# Altium PCB LEDBoard.PcbDoc
Units mm, origin at the board's own origin, x right, y up, seen from the top; angles counter-clockwise.
Board outline 21 x 160 mm, 2 copper layers (Top Layer, Bottom Layer), stack 0.51 mm thick; 16 components, 17 nets, 70 pads, 14 vias.
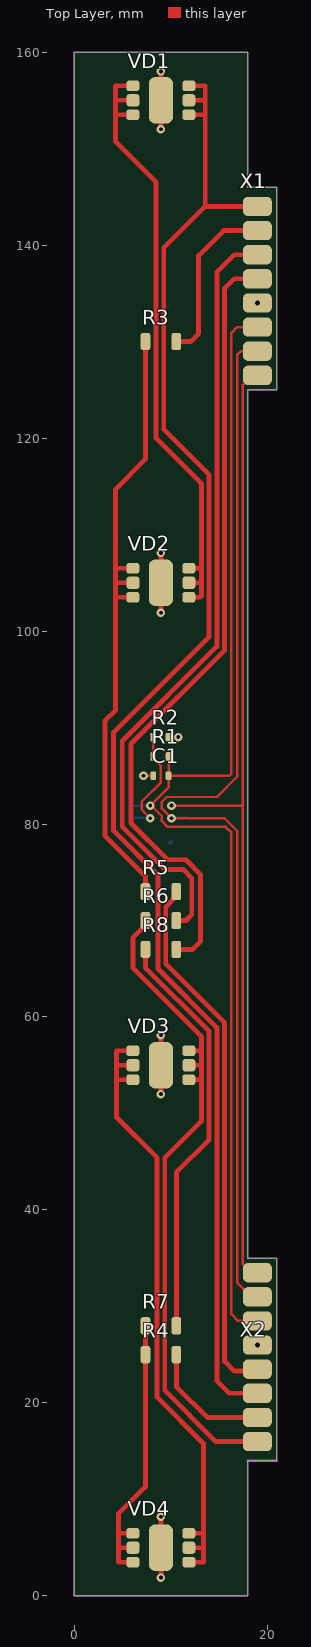
[diagram p0: Top Layer view]
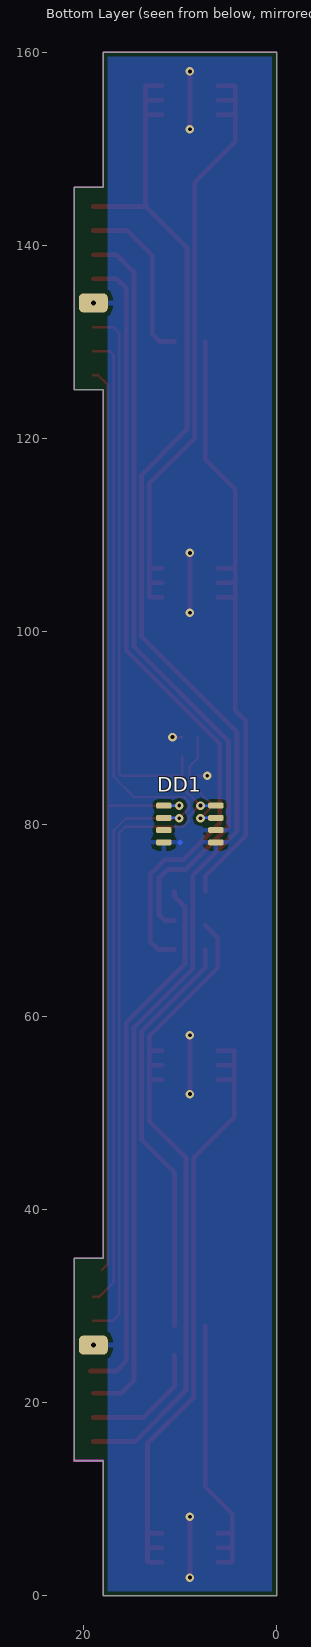
[diagram p1: Bottom Layer view, seen from below]

## Layer stack, top to bottom
Top Solder: solder mask 0.0102, Solder Resist, Dk 3.5
Top Layer: signal copper 0.035
Dielectric 1: dielectric 0.44, FR-4, Dk 4.8
Bottom Layer: signal copper 0.035
Bottom Solder: solder mask 0.0102, Solder Resist, Dk 3.5

## Board outline
0,0 0,160 18,160 18,146 21,146 21,125 18,125 18,35 21,35 21,14 18,14 18,0

## Design rules (kind name [scope] priority, off if disabled: settings)
Clearance Clearance_Mid2_to_edge [OnLayer('Mid-Layer 2') vs OnLayer('Keep-Out Layer')] p1: gap=0.5
Clearance Clearance_Mid1_to_edge [OnLayer('Mid-Layer 1') vs OnLayer('Keep-Out Layer')] p2: gap=0.5
Clearance Clearance_Top_to_edge [OnLayer('Top Layer') vs OnLayer('Keep-Out Layer')] p3: gap=0.25
Clearance Clearance_Bottom_to_edge [OnLayer('Bottom Layer') vs OnLayer('Keep-Out Layer')] p4: gap=0.25
Clearance ClearancePoly [InPolygon] p5: gap=0.3
Clearance [All] p6: gap=0.25
FabricationTestPointUsage TestPointUsage [All] p1: valid=0 allowmultiple=FALSE
FabricationTestpoint Testpoint [All] p1: side=3 testpointundercomponent=TRUE minsize=1.016 maxsize=2.54 preferedsize=1.524 minholesize=0 maxholesize=1.016 preferedholesize=0.813 testpointgrid=0.025 allowsidetop=TRUE allowsidebottom=TRUE usegrid=TRUE gridtolerance=0
PolygonConnect PolygonConnectToPad [All vs (InPadClass('All Pads'))] p1: connectstyle=Relief reliefconductorwidth=0.5 reliefentries=4 polygonreliefangle="90 Angle" airgapwidth=0.5
PolygonConnect [All] p2: connectstyle=Direct reliefconductorwidth=0.25 reliefentries=4 polygonreliefangle="45 Angle" airgapwidth=0.4
RoutingVias [All] p1: holewidth=0.4 width=0.9 viastyle="Through Hole" minholewidth=0.4 minwidth=0.9 maxholewidth=1 maxwidth=2
SilkToSolderMaskClearance SilkscreenOverComponentPads [IsPad] p1: minsilkscreentomaskgap=0.254 clearancetoexposedcopper=TRUE
SolderMaskExpansion [All] p1: expansion=0.102
Width [All] p1: maxlimit=3 minlimit=0.25 preferedwidth=0.5 minimp=50.000000 maximp=50.000000 favimp=50.000000
26 further rules are at their usual default settings.

## Components (designator, comment, footprint, x,y, rotation, side; value= is the part's Value field where it differs from the comment)
C1 "0.1u/16V/X7R" CapacitorSMD0603(manual) 9,85 r0 top
DD1 "LM75A" SO8 9,80 r180 bottom
R1 "47k/5%" ResistorSMD0603(manual) 9,87 r180 top
R2 "47k/5%" ResistorSMD0603(manual) 9,89 r0 top
R3 "0" ResistorSMD1206(manual) 9,130 r0 top
R4 "0" ResistorSMD1206(manual) 9,25 r0 top
R5 "0" ResistorSMD1206(manual) 9,73 r0 top
R6 "0" ResistorSMD1206(manual) 9,70 r0 top
R7 "0" ResistorSMD1206(manual) 9,28 r0 top
R8 "0" ResistorSMD1206(manual) 9,67 r0 top
VD1 "OLP-5065F6L-06A" OLP-5065F6L-06A(manualVar1) 9,155 r0 top
VD2 "OLP-5065F6L-06A" OLP-5065F6L-06A(manualVar1) 9,105 r0 top
VD3 "OLP-5065F6L-06A" OLP-5065F6L-06A(manualVar1) 9,55 r0 top
VD4 "OLP-5065F6L-06A" OLP-5065F6L-06A(manualVar1) 9,5 r0 top
X1 "ConnectorLEDSide" CONNECTORLEDSIDE 19,144 r0 top
X2 "ConnectorLEDSide" CONNECTORLEDSIDE 19,16 r180 top

## Footprints (in the part's own frame and the unit in brackets; to place one, negate y for a bottom-side part, rotate by r counter-clockwise, add the part's x,y. Pads: shape width x height; smd on the part's side, far side on the other; paste and mask are expansions set on the pad)
CapacitorSMD0603(manual) [mm]
  rrect50% 0.6x0.9 smd: 1(-0.8,0) 2(0.8,0)
  body extent -0.8,-0.4 0.8,0.4, height 0.45
CONNECTORLEDSIDE [mm]
  rrect50% 3x2 smd: 1(0,0) 2(0,-2.5) 3(0,-5) 4(0,-7.5) 6(0,-12.5) 7(0,-15) 8(0,-17.5)
  rrect50% 3x2 hole 0.5: 5(0,-10)
OLP-5065F6L-06A(manualVar1) [mm]
  rrect50% 1.35x1.1 smd: 1(-2.9,-1.5) 1(-2.9,1.5) 2(2.9,-1.5) 2(2.9,1.5)
  rrect50% 1.35x1.3 smd: 1(-2.9,0) 2(2.9,0)
  rrect50% 2.5x4.8 smd: 3(0,0)
  body extent -3.2,-2.5 3.2,2.5, height 1.3
ResistorSMD0603(manual) [mm]
  rrect50% 0.6x0.9 smd: 1(-0.8,0) 2(0.8,0)
  body extent -0.8,-0.4 0.8,0.4, height 0.45
ResistorSMD1206(manual) [mm]
  rrect50% 1x1.8 smd: 1(-1.6,0) 2(1.6,0)
  body extent -1.6,-0.8 1.6,0.8, height 0.6
SO8 [mm]
  rrect50% 1.6x0.6 smd: 1(-2.7,1.905) 2(-2.7,0.635) 3(-2.7,-0.635) 4(-2.7,-1.905) 5(2.7,-1.905) 6(2.7,-0.635) 7(2.7,0.635) 8(2.7,1.905)
  body extent -2,-2.5 2,2.5, height 1.8

## Part data
C1: library part CapacitorSMD0603(reflow), "CAPACITOR Capacitor SMD 0603 1.6x0.8mm"
DD1: "IC Temperature sensor"
R1 R2: library part ResistorSMD0603(reflow), "RESISTOR Resistor SMD 0603 1.6x0.8mm"
R3 R4 R5 R6 R7 R8: library part ResistorSMD1206, "RESISTOR Resistor SMD 1210 3.1x1.6mm"
VD1 VD2 VD3 VD4: "White LED 1.0W 155lm 3.0V 350mA"

## Via types
v1: diameter 0.9, hole 0.4, Top Layer to Bottom Layer, 14 vias

## Nets (pads, with @x,y where several pads share a name; then routed paths per layer and width w, separated by ;. In a path a pad name is that pad's centre, name@x,y a point inside that pad or via, vN(x,y) a via of type N, cw(c..) or ccw(c..) an arc to the next point about the centre after c; other vN are vias at no path point)
A0: DD1.7 R1.2 R2.1 | length 11.4
  Top Layer w0.254: v1(7.9,80.6) 7,81.5 7,82.3 9,84.3 9,86 R1.2@8.2,86.8 ; R1.2 R2.1
  Bottom Layer w0.254: DD1.7 7.965,80.635 v1@8,80.6
GND: C1.1 DD1.4 DD1.5 DD1.6 R2.2 VD1.3 VD2.3 VD3.3 VD4.3 X1.5 X2.5 | length 26.6
  Top Layer w0.25: v1(7.2,85) C1.1 ; R2.2 v1(10.8,89)
  Top Layer w0.5: v1(9,1.9) VD4.3 v1(9,8.2) ; v1(9,52) VD3.3 v1(9,58.1) ; v1(9,101.9) VD2.3 v1(9,108.1) ; v1(9,152) VD1.3 v1(9,158)
  Bottom Layer w0.5: 10,78.1 10.005,78.095
NetR3_2: R3.2 X1.2 | length 17.9
  Top Layer w0.5: R3.2 12.1,130 12.9,130.8 12.9,138.9 15.5,141.5 X1.2
NetR4_2: R4.2 X2.2 | length 13
  Top Layer w0.5: R4.2 10.6,21.7 13.8,18.5 X2.2
NetR5_2: R5.2 X2.4 | length 55.8
  Top Layer w0.5: R5.2 10.6,72.5 9.5,71.4 9.5,65.5 15.6,59.4 15.6,24.3 16.6,23.3 X2.4@19.3,23.3
NetR6_2: R6.2 X1.3 | length 81.5
  Top Layer w0.5: R6.2 11.6,70 12.2,70.6 12.2,74.4 11.3,75.3 9.4,75.3 5,79.7 5,88.6 14.8,98.4 14.8,137.2 16.6,139 X1.3
NetR7_2: R7.2 R8.1 | length 43.1
  Top Layer w0.5: R8.1 7.4,65.1 14,58.5 14,47.3 10.6,43.9 R7.2
NetR8_2: R8.2 X1.4 | length 82.5
  Top Layer w0.5: R8.2 12.3,67 13.1,67.8 13.1,74.8 11.6,76.3 9.7,76.3 5.9,80.1 5.9,88.3 15.6,98 15.6,135.5 16.6,136.5 X1.4
SCL: DD1.2 X1.7 X2.7 | length 115.5
  Top Layer w0.254: X2.7 18.4,31 16.9,32.5 16.9,79.3 15.6,80.6 v1(10.1,80.6) 9.1,81.6 9.1,82.3 9.6,82.8 14.8,82.8 16.9,84.9 16.9,128.6 17.3,129 X1.7
  Bottom Layer w0.254: v1@10,80.7 10.065,80.635 DD1.2
SDA: DD1.1 X1.8 X2.8 | length 103.1
  Top Layer w0.254: v1@10,81.9 17.5,81.9 ; X2.8@18.1,33.8 17.5,34.4 17.5,125.5 18.5,126.5 X1.8
  Bottom Layer w0.254: v1@10,81.9 10.005,81.905 DD1.1
  other v1: 10.1,81.9
STR1: VD1.1 VD2.2 | length 65.8
  Top Layer w0.5: VD1.1@6.1,153.5 4.3,153.5 ; VD1.1@6.1,155 4.3,155 ; VD1.1@6.1,156.5 4.3,156.5 4.3,155 ; VD2.2@11.9,103.5 13.1,103.5 13.2,103.6 13.2,105 ; VD2.2@11.9,105 13.2,105 ; VD2.2@11.9,106.5 13.1,106.5 ; 4.3,153.5 4.3,150.7 8.5,146.5 8.5,120 13.2,115.3 13.2,105 ; 4.3,153.5 4.3,155
STR1+: VD1.2 X1.1 X2.3 | length 161.7
  Top Layer w0.5: VD1.2@11.9,153.5 13.6,153.5 ; VD1.2@11.9,155 13.6,155 ; VD1.2@11.9,156.5 13.6,156.5 13.6,155 ; X2.3 16.1,21 14.8,22.3 14.8,58.9 8.7,65 8.7,74.7 4.1,79.3 4.1,89.5 14,99.4 14,116.2 9.3,120.9 9.3,139.7 13.6,144 ; X1.1 13.6,144 ; 13.6,144 13.6,153.5 ; 13.6,153.5 13.6,155
STR1-: R3.1 R5.1 VD2.1 | length 65.8
  Top Layer w0.5: 4.4,103.5 VD2.1@6.1,103.5 ; VD2.1@6.1,105 4.3,105 ; VD2.1@6.1,106.5 4.3,106.5 ; R5.1 7.4,74.6 3.2,78.8 3.2,90.7 4.3,91.8 4.3,105 ; R3.1 7.4,117.8 4.3,114.7 4.3,106.5 ; 4.3,105 4.3,106.5
STR2: VD3.1 VD4.2 | length 66.3
  Top Layer w0.5: VD3.1@6,53.4 6.1,53.5 4.4,53.5 ; VD3.1@6.1,55 4.4,55 ; VD3.1@6.1,56.5 4.4,56.5 4.4,55 ; VD4.2@11.9,3.5 13.4,3.5 13.4,15.8 8.6,20.6 8.6,45.4 4.4,49.6 4.4,53.5 ; VD4.2@11.9,5 13.35,5 ; VD4.2@11.9,6.5 13.3,6.5 ; 4.4,53.5 4.4,55
STR2+: R6.1 VD3.2 X2.1 | length 68.8
  Top Layer w0.5: R6.1@7.4,69.5 6.1,68.2 6.1,65.1 13.2,58 13.2,55 ; VD3.2@11.9,53.5 13.2,53.5 ; VD3.2@11.9,55 13.2,55 ; VD3.2@11.9,56.5 13.1,56.5 ; X2.1 14.7,16 9.4,21.3 9.4,45.4 13.2,49.2 13.2,55
STR2-: R4.1 R7.1 VD4.1 | length 30.2
  Top Layer w0.5: VD4.1@6.1,3.5 4.6,3.5 4.6,5 ; VD4.1@6.1,5 4.6,5 ; VD4.1@6.1,6.5 4.6,6.5 ; R7.1 R4.1 7.4,11.3 4.6,8.5 4.6,6.5 ; 4.6,5 4.6,6.5
VCC: C1.2 DD1.8 R1.1 X1.6 X2.6 | length 125.5
  Top Layer w0.254: v1(7.895,81.905) 7.905,81.905 9.8,83.8 C1.2 ; v1@8,81.91 7.995,81.905 9.1,80.8 9.1,80.3 9.7,79.7 15.7,79.7 16.3,79.1 16.3,29.2 17,28.5 X2.6 ; R1.1 C1.2 ; X1.6 16.9,131.5 16.3,130.9 16.3,85.2 16.1,85 C1.2
  Bottom Layer w0.254: DD1.8 v1(7.895,81.905) 7.995,81.905 v1@8,81.9
pads on no net: DD1.3

## Polygon pours and split planes (outlines as drawn)
GND on Bottom Layer "Signal Layer 1-No Net" (solid, pour order 2): 0.5,159.5 17.5,159.5 17.5,0.5 0.5,0.5

## Keep-outs
Keep-Out Layer:
  the board outline again, w0.1

## Text inside footprints (layer, text, board x,y; h text height)
X1: Mechanical 1 "4" at 18.5,136 h2; Mechanical 1 "3" at 18.5,138.5 h2; Mechanical 1 "2" at 18.5,141 h2; Mechanical 1 "1" at 18.5,143.5 h2; Mechanical 1 "5" at 18.5,133.5 h2; Mechanical 1 "6" at 18.5,131 h2; Mechanical 1 "7" at 18.5,128.5 h2; Mechanical 1 "8" at 18.5,126 h2
X2: Mechanical 1 "8" at 19.5,34 h2 r180; Mechanical 1 "7" at 19.5,31.5 h2 r180; Mechanical 1 "6" at 19.5,29 h2 r180; Mechanical 1 "5" at 19.5,26.5 h2 r180; Mechanical 1 "1" at 19.5,16.5 h2 r180; Mechanical 1 "2" at 19.5,19 h2 r180; Mechanical 1 "3" at 19.5,21.5 h2 r180; Mechanical 1 "4" at 19.5,24 h2 r180